# EAGLE board Elspark v5 (EAGLE 6.5.0)
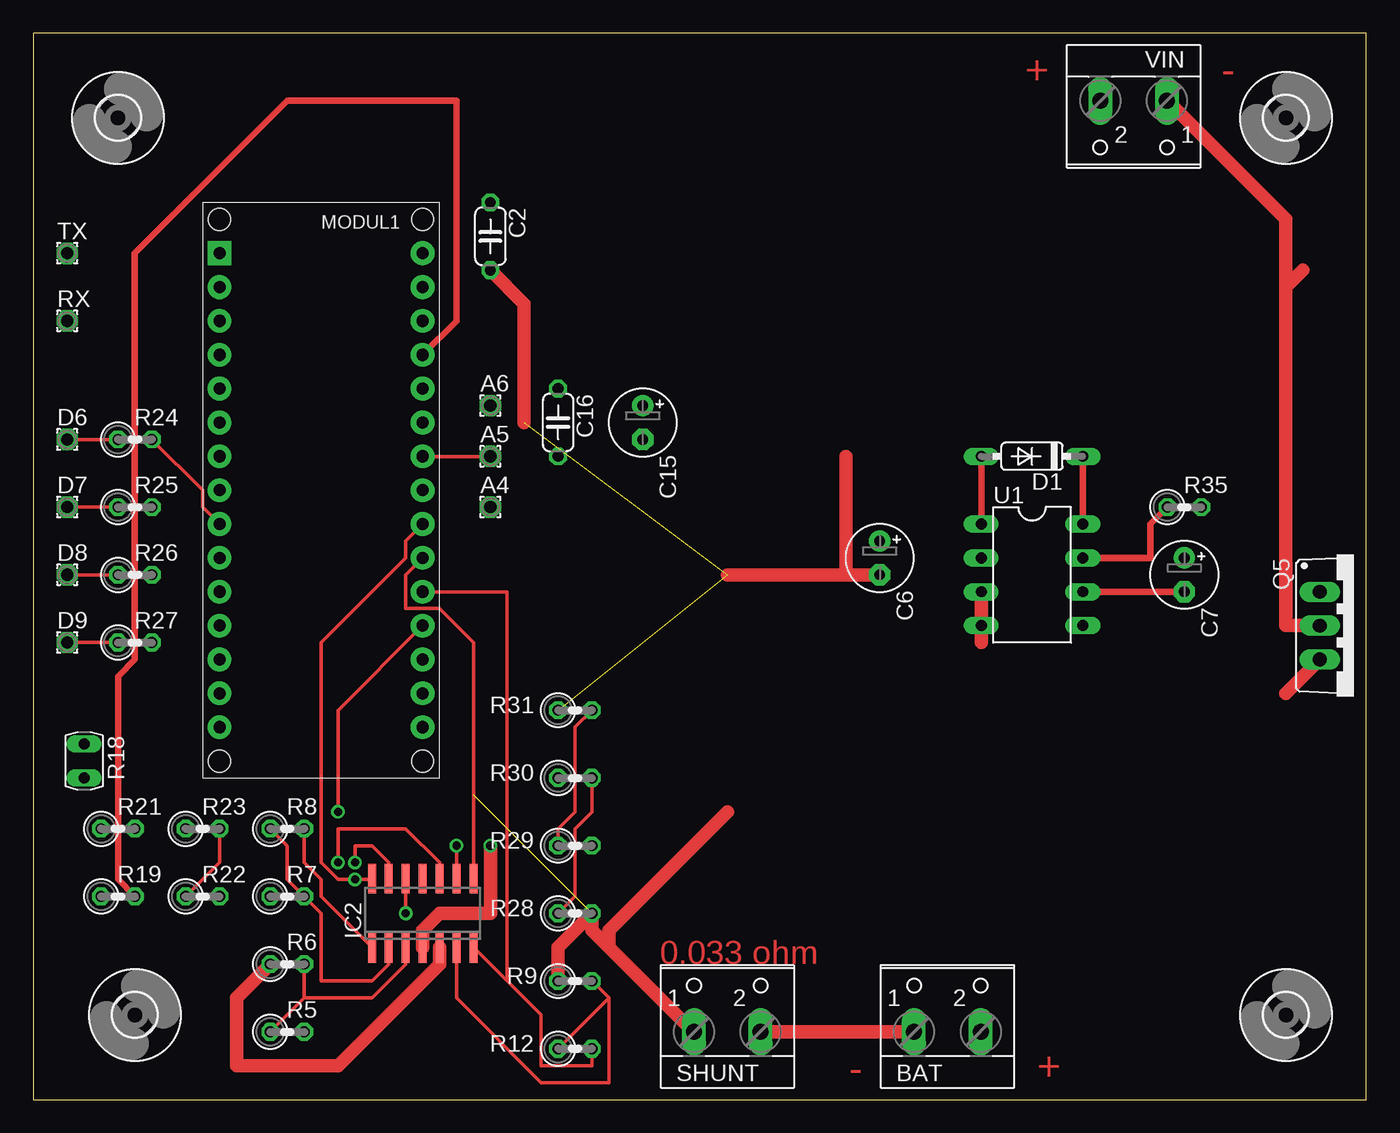
[diagram p0: board, top side]
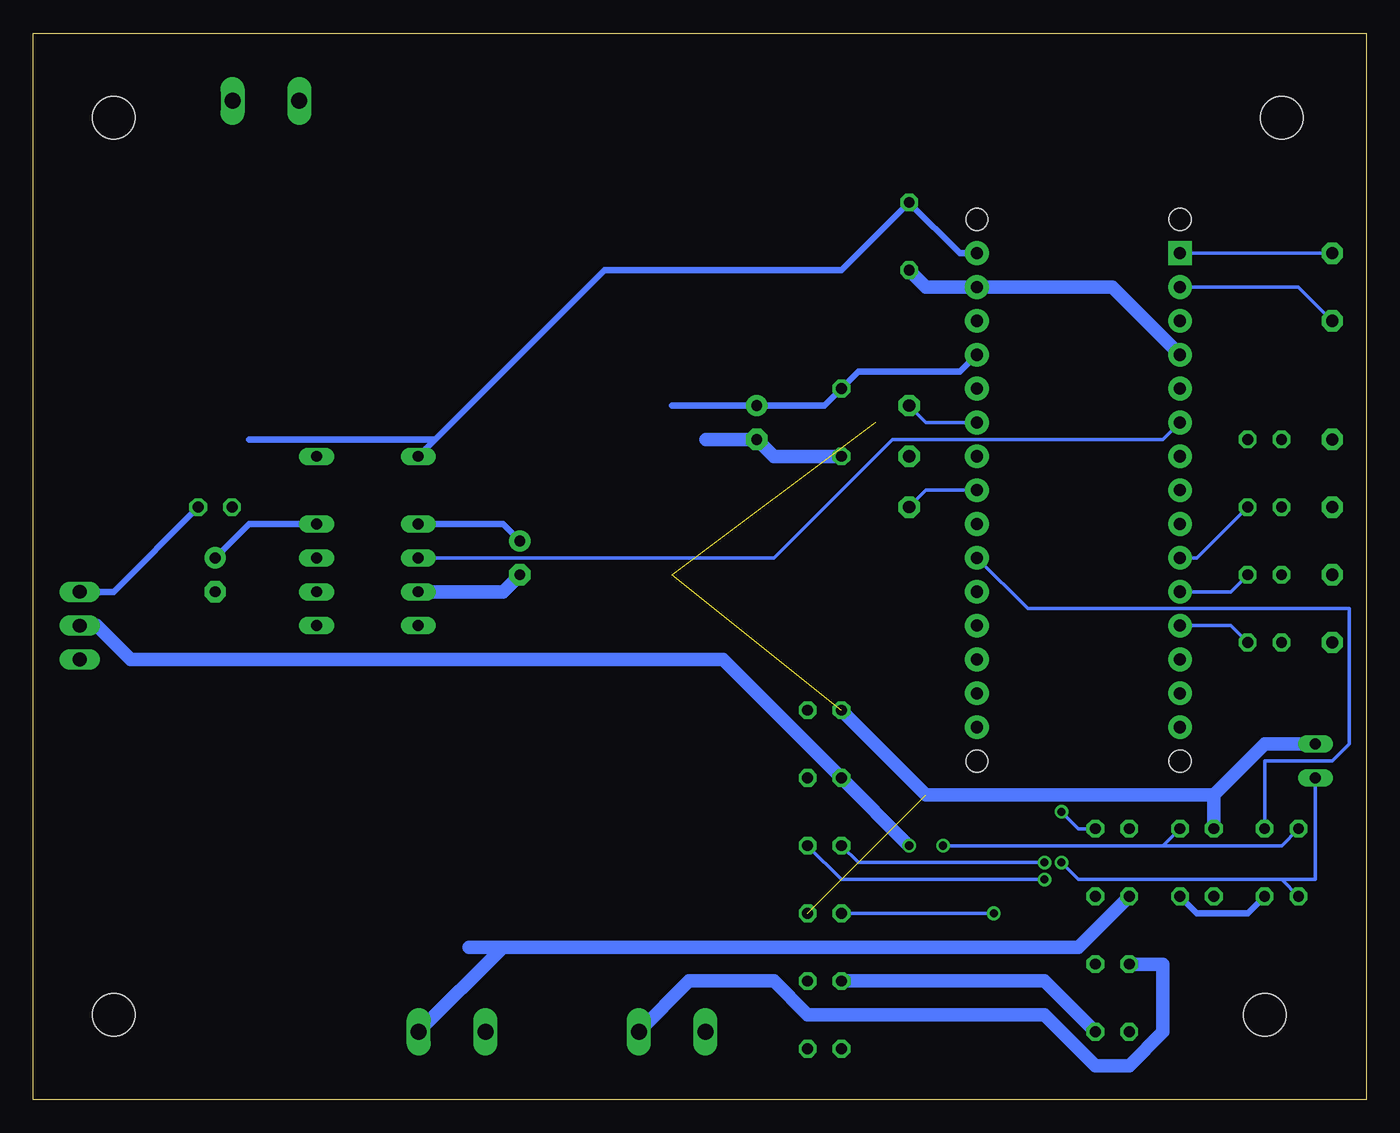
[diagram p1: board, bottom side, seen from below]

Size 100 x 80 mm. Coordinates in mm from the lower left corner, seen from the top.
Outline: 0,0 100,0 100,80 0,80 0,0
Copper layers (1*16): Top 0.035mm / dielectric 1.5mm / Bottom 0.035mm
Design rules "default": minimum track width 10mil, minimum drill 24mil, track to track 10mil, track to pad 10mil, pad to pad 10mil, via to via 10mil, smd to smd 10mil, copper to edge 40mil, drill to drill 10mil, minimum pad ring 10mil, minimum via ring 8mil, stop-mask expansion 0mil, vias tented up to drill 0mil, thermal gap 10mil
Net classes: 1 Power: width 0.5 mm; 2 HighPower: width 1 mm

## Footprints (pad centres in the part's own frame; a part is rotated, then mirrored left to right if it is on the bottom)
1,6/0,9 = drill 0.914 pad 1.6 octagon: 1 0,0
W237-102 = drill 1.194 long: 1 -2.5,-1.27; 2 2.5,-1.27
C050-024X044 = drill 0.813 octagon: 1 -2.54,0; 2 2.54,0
E2,5-5 = drill 0.813 pad 1.6: + -1.27,0 | drill 0.813 pad 1.6 octagon: - 1.27,0
DO35-7 = drill 0.813 long: A 3.81,0; C -3.81,0
3,2 = hole 3.2: 0,0
SO14 = smd 0.6 x 2.2: 1 -3.81,-2.6; 2 -2.54,-2.6; 3 -1.27,-2.6; 4 0,-2.6; 5 1.27,-2.6; 6 2.54,-2.6; 7 3.81,-2.6; 8 3.81,2.6; 9 2.54,2.6; 10 1.27,2.6; 11 0,2.6; 12 -1.27,2.6; 13 -2.54,2.6; 14 -3.81,2.6
ARDUINO_NANO2 = drill 0.914 pad 1.778 square: J1.1 -7.62,17.78 | drill 0.914 pad 1.778: J1.2 -7.62,15.24; J1.3 -7.62,12.7; J1.4 -7.62,10.16; J1.5 -7.62,7.62; J1.6 -7.62,5.08; J1.7 -7.62,2.54; J1.8 -7.62,0; J1.9 -7.62,-2.54; J1.10 -7.62,-5.08; J1.11 -7.62,-7.62; J1.12 -7.62,-10.16; J1.13 -7.62,-12.7; J1.14 -7.62,-15.24; J1.15 -7.62,-17.78; J2.1 7.62,17.78; J2.2 7.62,15.24; J2.3 7.62,12.7; J2.4 7.62,10.16; J2.5 7.62,7.62; J2.6 7.62,5.08; J2.7 7.62,2.54; J2.8 7.62,0; J2.9 7.62,-2.54; J2.10 7.62,-5.08; J2.11 7.62,-7.62; J2.12 7.62,-10.16; J2.13 7.62,-12.7; J2.14 7.62,-15.24; J2.15 7.62,-17.78 | hole 1.651: -7.62,-20.32; 7.62,-20.32; 7.62,20.32; -7.62,20.32
TO220BV = drill 1.016 long: D 0,-2.54; G -2.54,-2.54; S 2.54,-2.54
0207/2V = drill 0.813 octagon: 1 -1.27,0; 2 1.27,0
N640 = drill 0.813 long: 1 -1.27,0; 2 1.27,0
DIL08 = drill 0.813 long: 1 -3.81,-3.81; 2 -1.27,-3.81; 3 1.27,-3.81; 4 3.81,-3.81; 5 3.81,3.81; 6 1.27,3.81; 7 -1.27,3.81; 8 -3.81,3.81

## Placement (x,y rotation side)
A4  [1,6/0,9]  34.29,44.45 0 top
A5  [1,6/0,9]  34.29,48.26 0 top
A6  [1,6/0,9]  34.29,52.07 0 top
BAT  [W237-102]  68.58,6.35 0 top
C2  100n  [C050-024X044]  34.29,64.77 270 top
C6  100u  [E2,5-5]  63.5,40.64 270 top
C7  100u  [E2,5-5]  86.36,39.37 270 top
C15  24u  [E2,5-5]  45.72,50.8 270 top
C16  100n  [C050-024X044]  39.37,50.8 270 top
D1  1N4148DO35-7  [DO35-7]  74.93,48.26 180 top
D6  Switch0  [1,6/0,9]  2.54,49.53 0 top
D7  Switch1  [1,6/0,9]  2.54,44.45 0 top
D8  Switch2  [1,6/0,9]  2.54,39.37 0 top
D9  Switch3  [1,6/0,9]  2.54,34.29 0 top
H1  MOUNT-HOLE3.2  [3,2]  6.35,73.66 0 top
H2  MOUNT-HOLE3.2  [3,2]  93.98,73.66 0 top
H3  MOUNT-HOLE3.2  [3,2]  93.98,6.35 0 top
H4  MOUNT-HOLE3.2  [3,2]  7.62,6.35 0 top
IC2  TLC274D  [SO14]  29.21,13.97 0 top
MODUL1  ARDUINO_NANO2  [ARDUINO_NANO2]  21.59,45.72 0 top
Q5  IRF540  [TO220BV]  99.06,35.56 270 top
R5  3k3  [0207/2V]  19.05,5.08 0 top
R6  33k  [0207/2V]  19.05,10.16 0 top
R7  33k  [0207/2V]  19.05,15.24 0 top
R8  3k3  [0207/2V]  19.05,20.32 0 top
R9  680  [0207/2V]  40.64,8.89 0 top
R12  39k  [0207/2V]  40.64,3.81 0 top
R18  100k  [N640]  3.81,25.4 270 top
R19  47k  [0207/2V]  6.35,15.24 0 top
R21  47  [0207/2V]  6.35,20.32 0 top
R22  47  [0207/2V]  12.7,15.24 0 top
R23  47  [0207/2V]  12.7,20.32 0 top
R24  1k  [0207/2V]  7.62,49.53 0 top
R25  1k  [0207/2V]  7.62,44.45 0 top
R26  1k  [0207/2V]  7.62,39.37 0 top
R27  1k  [0207/2V]  7.62,34.29 0 top
R28  2k7  [0207/2V]  40.64,13.97 0 top
R29  0  [0207/2V]  40.64,19.05 0 top
R30  33k  [0207/2V]  40.64,24.13 0 top
R31  33k  [0207/2V]  40.64,29.21 0 top
R35  100  [0207/2V]  86.36,44.45 0 top
RX  [1,6/0,9]  2.54,58.42 0 top
SHUNT  [W237-102]  52.07,6.35 0 top
TX  [1,6/0,9]  2.54,63.5 0 top
U1  IR2103  [DIL08]  74.93,39.37 270 top
VIN  [W237-102]  82.55,73.66 180 top

## Library data of the parts
A4-A6 D6-D9 RX TX = wirepad
BAT SHUNT VIN = con-wago-500; MPN: 237-102; OC_FARNELL: unknown; OC_NEWARK: 70K9898
C2 C6 C7 C15 C16 R5-R9 R12 R19 R21-R31 R35 = rcl
D1 = diode
H1-H4 = holes
IC2 = linear
MODUL1 = arduino; ANZAHL: 2; MODUL: TRUE; STECKX0: -76200; STECKX1: 76200; STECKY0: 177800; STECKY1: 177800
Q5 = transistor-power
R18 = ptc-ntc
U1 = irf-2

## Nets
3V3: MODUL1.J2.14
+5V [Power]: C15.+ C16.1 MODUL1.J2.4 R19.2 R22.2
+12V [Power]: C2.1 C6.+ D1.A MODUL1.J2.1 U1.1
AREF: MODUL1.J2.13
B+ [HighPower]: BAT.2 R7.1
B-/SHUNT [HighPower]: BAT.1 IC2.5 R6.1 SHUNT.2
CHARGEPWM: MODUL1.J1.6 U1.2
CHOPEDPOWER [HighPower]: Q5.S
GND [HighPower]: C2.2 C6.- MODUL1.J1.4 MODUL1.J2.2 R5.2 R9.1 R18.1 R23.1 R28.2 R31.1 SHUNT.1 U1.3 U1.4
INVOLTAGESIGNAL: IC2.14 MODUL1.J2.9 R29.2
N$2 [Power]: C7.- U1.6
N$3: IC2.12 R28.1 R30.2
N$4 [Power]: Q5.G R35.2
N$5: A4.1 MODUL1.J2.8
N$6: MODUL1.J1.1 TX.1
N$7 [HighPower]: VIN.2
N$8: MODUL1.J1.9 R24.2
N$10 [HighPower]: VIN.1
N$11: IC2.6 R9.2 R12.1
N$12: MODUL1.J1.10 R25.2
N$14: MODUL1.J1.11 R26.2
N$15: MODUL1.J1.12 R27.2
N$16: A5.1 MODUL1.J2.7
N$17: A6.1 MODUL1.J2.6
N$18: MODUL1.J1.2 RX.1
N$19 [HighPower]: C15.- C16.2
N$20 [Power]: R35.1 U1.7
N$24: IC2.3 R5.1 R6.2
N$27: IC2.2 R7.2 R8.1
N$39: IC2.9 R21.1 R22.1 R23.2
N$46: IC2.10 R18.2 R19.1
N$48: IC2.13 R29.1 R31.2
N$54: D6.1 R24.1
N$55: D7.1 R25.1
N$56: D8.1 R26.1
N$57: D9.1 R27.1
OUTCURRENTSIGNAL: IC2.7 MODUL1.J2.11 R12.2
OUTVOLTAGESIGNAL: IC2.1 MODUL1.J2.12 R8.2
TEMPSIGNAL: IC2.8 MODUL1.J2.10 R21.2
V+ [HighPower]: IC2.4 Q5.D R30.1
V-: IC2.11
VB [Power]: C7.+ D1.C U1.8

## Tracks (layer width: path | path; a pad name or v marks a point on that pad's centre or on a via)
+5V
  Top 0.5: R19.2 6.35,16.51 6.35,31.75 7.62,33.02 7.62,63.5 19.05,74.93 31.75,74.93 31.75,58.42 MODUL1.J2.4
  Bottom 0.5: 52.07,52.07 C15.+ 40.64,52.07 C16.1 38.1,54.61 30.48,54.61 MODUL1.J2.4 | R19.2 8.89,13.97 12.7,13.97 R22.2
+12V
  Top 0.5: D1.A U1.1
  Bottom 0.5: MODUL1.J2.1 30.48,63.5 C2.1 39.37,62.23 57.15,62.23 69.85,49.53 | C6.+ 64.77,43.18 U1.1 | D1.A 69.85,49.53 | 69.85,49.53 83.82,49.53
B+
  Bottom 1: R7.1 21.59,11.43 64.77,11.43 | 67.31,11.43 64.77,11.43 | 64.77,11.43 71.12,5.08 BAT.2
B-/SHUNT
  Top 1: BAT.1 SHUNT.2 | R6.1 15.24,7.62 15.24,2.54 22.86,2.54 30.48,10.16 IC2.5 30.48,11.43
  Bottom 1: R6.1 15.24,10.16 15.24,5.08 17.78,2.54 20.32,2.54 24.13,6.35 41.91,6.35 44.45,8.89 50.8,8.89 54.61,5.08 SHUNT.2
CHARGEPWM
  Bottom 0.254: U1.2 44.45,40.64 35.56,49.53 15.24,49.53 MODUL1.J1.6
CHOPEDPOWER
  Top 1: 93.98,30.48 Q5.S
GND  (3 unrouted)
  Top 1: R9.1 39.37,11.43 R28.2 41.91,12.7 43.18,11.43 | 43.18,11.43 49.53,5.08 SHUNT.1 | 52.07,21.59 43.18,12.7 43.18,11.43 | U1.3 U1.4 71.12,34.29 | C2.2 36.83,59.69 36.83,50.8 | 52.07,39.37 60.96,39.37 | 60.96,39.37 C6.- | 60.96,39.37 60.96,48.26
  Bottom 1: R5.2 24.13,8.89 R9.1 | C6.- 64.77,38.1 U1.3 | C2.2 33.02,60.96 MODUL1.J2.2 19.05,60.96 MODUL1.J1.4 | R18.1 7.62,26.67 11.43,22.86 | R23.1 11.43,22.86 | 11.43,22.86 33.02,22.86 R31.1
INVOLTAGESIGNAL  (via drill 0.61)
  Top 0.254: MODUL1.J2.9 27.94,41.91 27.94,40.64 21.59,34.29 21.59,17.78 22.86,16.51 v24.13,16.51 25.4,16.51 IC2.14
  Bottom 0.254: R29.2 39.37,16.51 v24.13,16.51
N$2
  Top 0.5: C7.- U1.6
N$3  (via drill 0.61)
  Top 0.254: v27.94,13.97 IC2.12 | R30.2 41.91,21.59 40.64,20.32 40.64,15.24 R28.1
  Bottom 0.254: R28.1 v27.94,13.97
N$4
  Bottom 0.5: R35.2 93.98,38.1 Q5.G
N$5
  Bottom 0.254: A4.1 33.02,45.72 MODUL1.J2.8
N$6
  Bottom 0.254: MODUL1.J1.1 TX.1
N$8
  Top 0.254: R24.2 12.7,45.72 12.7,44.45 MODUL1.J1.9
N$11
  Top 0.254: 43.18,7.62 43.18,1.27 38.1,1.27 31.75,7.62 IC2.6 31.75,11.43 | R9.2 43.18,7.62 | 43.18,7.62 R12.1
N$12
  Bottom 0.254: R25.2 12.7,40.64 MODUL1.J1.10
N$14
  Bottom 0.254: R26.2 10.16,38.1 MODUL1.J1.11
N$15
  Bottom 0.254: R27.2 10.16,35.56 MODUL1.J1.12
N$16
  Top 0.254: MODUL1.J2.7 A5.1
N$17
  Bottom 0.254: A6.1 33.02,50.8 MODUL1.J2.6
N$18
  Bottom 0.254: RX.1 5.08,60.96 MODUL1.J1.2
N$19
  Bottom 1: 49.53,49.53 C15.- 44.45,48.26 C16.2
N$20
  Top 0.5: U1.7 83.82,40.64 83.82,43.18 R35.1
N$24
  Top 0.254: 20.32,7.62 25.4,7.62 27.94,10.16 IC2.3 27.94,11.43 | R6.2 20.32,7.62 | 20.32,7.62 R5.1
N$27
  Top 0.254: 26.67,11.43 IC2.2 26.67,10.16 25.4,8.89 21.59,8.89 21.59,13.97 R7.2 19.05,16.51 19.05,19.05 R8.1
N$39  (via drill 0.61)
  Top 0.254: v31.75,19.05 IC2.9 31.75,16.51 | R22.1 13.97,17.78 R23.2
  Bottom 0.254: 15.24,19.05 v31.75,19.05 | R23.2 15.24,19.05 | R21.1 6.35,19.05 15.24,19.05
N$46  (via drill 0.61)
  Top 0.254: v22.86,17.78 22.86,20.32 27.94,20.32 30.48,17.78 IC2.10 30.48,16.51
  Bottom 0.254: v22.86,17.78 21.59,16.51 6.35,16.51 | R19.1 6.35,16.51 | R18.2 3.81,16.51 6.35,16.51
N$48  (via drill 0.61)
  Top 0.254: v24.13,17.78 24.13,19.05 25.4,19.05 26.67,17.78 IC2.13 26.67,16.51 | R31.2 40.64,27.94 40.64,21.59 39.37,20.32 R29.1
  Bottom 0.254: v24.13,17.78 38.1,17.78 R29.1
N$54
  Top 0.254: D6.1 R24.1
N$55
  Top 0.254: D7.1 R25.1
N$56
  Top 0.254: D8.1 R26.1
N$57
  Top 0.254: D9.1 R27.1
OUTCURRENTSIGNAL
  Top 0.254: 35.56,8.89 38.1,6.35 38.1,2.54 41.91,2.54 R12.2 | 35.56,8.89 33.02,11.43 IC2.7 | MODUL1.J2.11 35.56,38.1 35.56,8.89
OUTVOLTAGESIGNAL  (via drill 0.61)
  Top 0.254: R8.2 20.32,17.78 21.59,16.51 21.59,15.24 25.4,11.43 IC2.1 | MODUL1.J2.12 22.86,29.21 v22.86,21.59
  Bottom 0.254: v22.86,21.59 21.59,20.32 R8.2
TEMPSIGNAL
  Top 0.254: MODUL1.J2.10 27.94,39.37 27.94,36.83 30.48,36.83 33.02,34.29 IC2.8 33.02,16.51
  Bottom 0.254: R21.2 7.62,25.4 2.54,25.4 1.27,26.67 1.27,36.83 25.4,36.83 MODUL1.J2.10
V+  (via drill 0.61)
  Top 1: IC2.4 29.21,12.7 30.48,13.97 34.29,13.97 v34.29,19.05 | Q5.D 93.98,35.56 93.98,57.15 93.98,60.96 | 95.25,62.23 93.98,60.96 | 85.09,74.93 93.98,66.04 93.98,60.96
  Bottom 1: v34.29,19.05 R30.1 48.26,33.02 92.71,33.02 95.25,35.56 Q5.D
VB
  Top 0.5: D1.C U1.8
  Bottom 0.5: C7.+ 83.82,43.18 U1.8

## Text on the board
Top: + | - | 0.033 ohm | + | -